# EAGLE board RS232v28_9x (EAGLE 9.7.0)
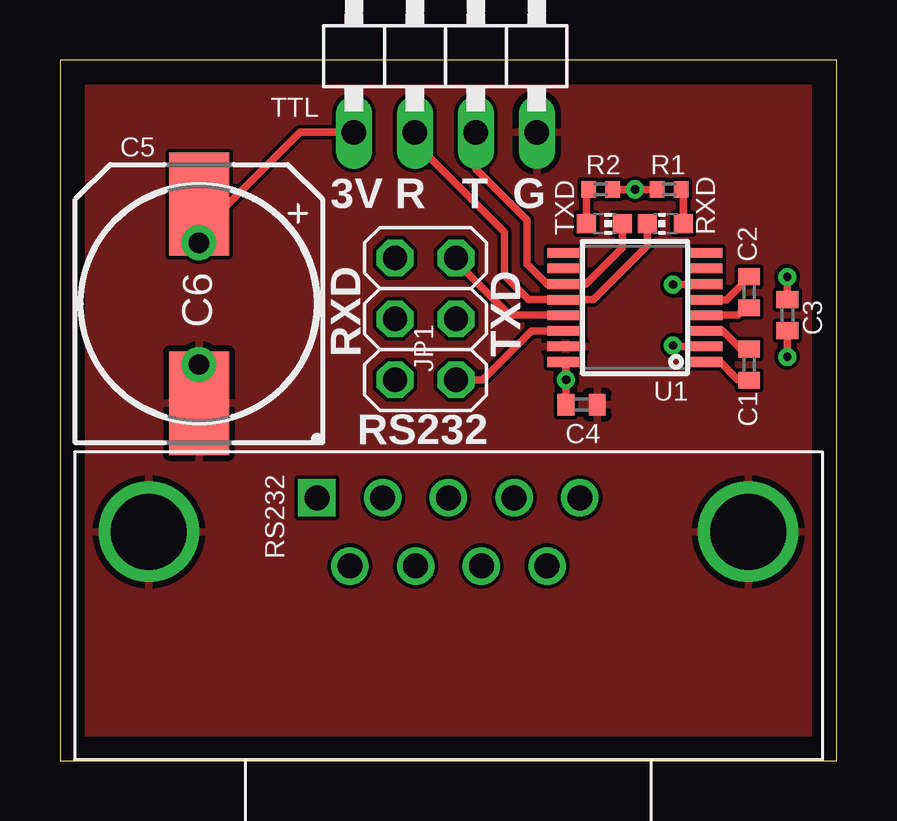
[diagram p0: board, top side]
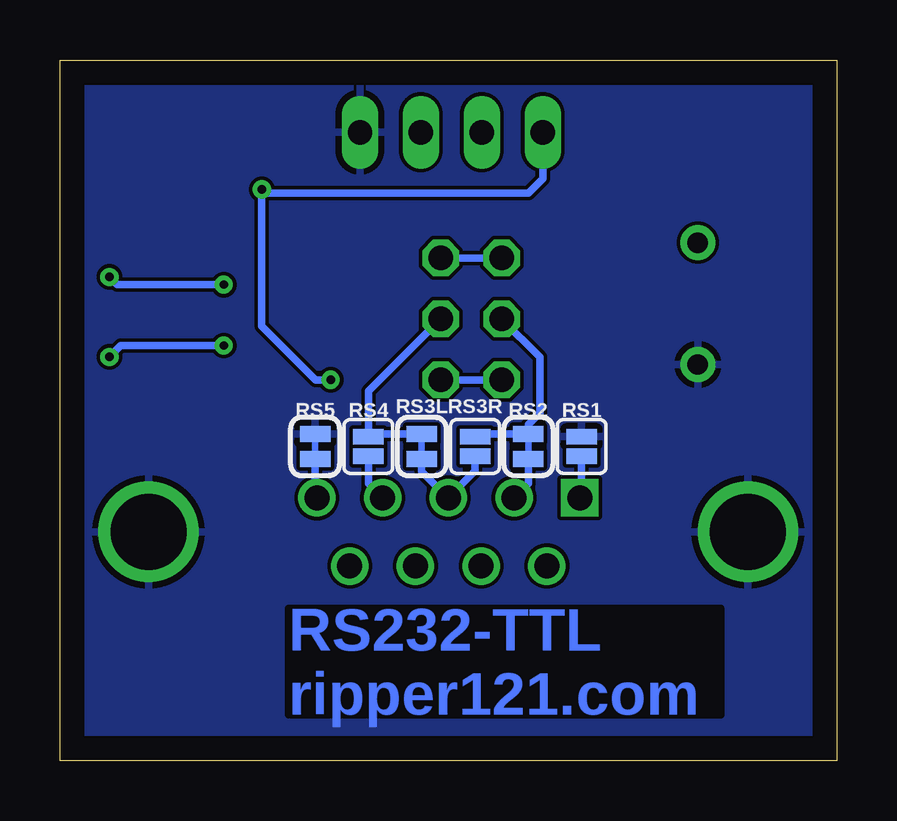
[diagram p1: board, bottom side, seen from below]

Size 32.38 x 29.21 mm. Coordinates in mm from the lower left corner, seen from the top.
Outline: 0,0 32.38,0 32.38,29.21 0,29.2 0,0
Copper layers (1*16): Top 0.035mm / dielectric 1.5mm / Bottom 0.035mm
Design rules "default": minimum track width 6mil, minimum drill 0.35mm, track to track 6mil, track to pad 6mil, pad to pad 6mil, via to via 6mil, smd to smd 6mil, copper to edge 40mil, drill to drill 6mil, minimum pad ring 10mil, minimum via ring 8mil, stop-mask expansion 4mil, vias tented up to drill 0mil, thermal gap 10mil

## Footprints (pad centres in the part's own frame; a part is rotated, then mirrored left to right if it is on the bottom)
C0402 = smd 0.7 x 0.9: 1 -0.65,0; 2 0.65,0
140CLH-1010 = smd 4.3 x 2.5: + 4.15,0; - -4.15,0
CAPPRD508W65D1000H1100B = drill 0.85 pad 1.45: 1 -2.54,0; 2 2.54,0
2X03 = drill 1.016 octagon: 1 -2.54,-1.27; 2 -2.54,1.27; 3 0,-1.27; 4 0,1.27; 5 2.54,-1.27; 6 2.54,1.27
R0402 = smd 0.6 x 0.7: 1 -0.5,0; 2 0.5,0
SMT-JUMPER_2_NO_SILK = smd 0.635 x 1.27: 1 -0.406,0; 2 0.406,0
SMT-JUMPER_2_NC_TRACE_SILK = smd 0.66 x 1.27: 1 -0.521,0; 2 0.521,0
5747840-4 = drill 1.04 square: 1 0,0 | drill 1.04: 2 2.74,0; 3 5.48,0; 4 8.22,0; 5 10.96,0; 6 1.37,-2.84; 7 4.11,-2.84; 8 6.85,-2.84; 9 9.59,-2.84 | drill 3.17: MH1 -7.01,-1.42; MH2 17.98,-1.42
CHIP-LED0603 = smd 0.8 x 0.8: A 0,-0.75; C 0,0.75
1X04/90 = drill 1.016 long: 1 -3.81,-3.81; 2 -1.27,-3.81; 3 1.27,-3.81; 4 3.81,-3.81
TSSOP16 = smd 0.4 x 1.5: 1 -2.275,-2.9; 2 -1.625,-2.9; 3 -0.975,-2.9; 4 -0.325,-2.9; 5 0.325,-2.9; 6 0.975,-2.9; 7 1.625,-2.9; 8 2.275,-2.9; 9 2.275,2.9; 10 1.625,2.9; 11 0.975,2.9; 12 0.325,2.9; 13 -0.325,2.9; 14 -0.975,2.9; 15 -1.625,2.9; 16 -2.275,2.9

## Placement (x,y rotation side)
C1  100n  [C0402]  28.73,16.51 90 top
C2  100n  [C0402]  28.73,19.53 90 top
C3  100n  [C0402]  30.32,18.57 90 top
C4  100n  [C0402]  21.75,14.84 0 top
C5  1000uF  [140CLH-1010]  5.79,19.05 90 top
C6  [CAPPRD508W65D1000H1100B]  5.79,19.05 270 top
JP1  PINHD-2X3  [2X03]  15.24,18.41 270 top
R1  1k  [R0402]  25.4,23.81 180 top
R2  1k  [R0402]  22.54,23.81 0 top
RS1  JUMPER-SMT_2_NO_SILK  [SMT-JUMPER_2_NO_SILK]  10.64,13.1 270 bottom
RS2  JUMPER-SMT_2_NO_SILK  [SMT-JUMPER_2_NC_TRACE_SILK]  12.86,13.1 270 bottom
RS3L  JUMPER-SMT_2_NC_TRACE_SILK  [SMT-JUMPER_2_NC_TRACE_SILK]  17.3,13.1 270 bottom
RS3R  JUMPER-SMT_2_NC_TRACE_SILK  [SMT-JUMPER_2_NO_SILK]  15.08,13.1 270 bottom
RS4  JUMPER-SMT_2_NO_SILK  [SMT-JUMPER_2_NO_SILK]  19.53,13.1 270 bottom
RS5  JUMPER-SMT_2_NO_SILK  [SMT-JUMPER_2_NC_TRACE_SILK]  21.75,13.1 270 bottom
RS232  D-DMR009  [5747840-4]  10.72,10.95 0 top
RXD  RED  [CHIP-LED0603]  25.24,22.38 90 top
TTL  PINHD-1X4/90  [1X04/90]  16.07,30 0 top
TXD  GREEN  [CHIP-LED0603]  22.7,22.38 270 top
U1  SP3232XTSSOP  [TSSOP16]  23.97,18.89 90 top

## Library data of the parts
C1-C5 = rcl; SPICEPREFIX: C
C6 = Capacitor; CATEGORY: Capacitor
JP1 = Connector; CATEGORY: Headers; DESCRIPTION: Header, Straight, 2x3 Position; MANUFACTURER: Generic; MPN: Generic; OPERATING_TEMPERATURE: Generic; PART_STATUS: Active; PITCH: 0.100" (2.54mm); ROHS_COMPLIANCE: Generic; SERIES: Generic; SUB-CATEGORY: Headers, Male Pins; TYPE: Board to Board or Cable, Unshrouded, Through Hole, Straight
R1 R2 = rcl; SPICEPREFIX: R
RS1 RS2 RS3L RS3R RS4 RS5 = SparkFun-Jumpers
RS232 = Connector_D-Sub; CATEGORY: Connector; DESCRIPTION: PCB D-Sub Connectors, Receptacle, Board-to-Board, 9 Position, 2.74mm [.108in] Centerline, 2 Row, Row-to-Row Spacing 2.84 mm [.112 in]; GENDER: Male; MANUFACTURER: TE Connectivity; MPN: 5747840-4; OPERATING_TEMP: -55°C to +105 °C; PART_STATUS: Active; ROHS_COMPLIANT: RoHS Compliant; SERIES: AMPLIMITE HD-20; SUB-CATEGORY: D-SUB; TYPE: R/A
RXD TXD = led
TTL = Connector; CATEGORY: Headers; DESCRIPTION: Header, Right Angle, 4 Position; MANUFACTURER: Generic; MPN: Generic; OPERATING_TEMPERATURE: Generic; PART_STATUS: Active; PITCH: 0.100" (2.54mm); ROHS_COMPLIANCE: Generic; SERIES: Generic; SUB-CATEGORY: Headers, Male Pins; TYPE: Board to Board or Cable, Unshrouded, Through Hole, Right Angle
U1 = SP3232EEY-L

## Nets
3V3: C4.1 C5.+ C6.1 R1.2 R2.2 TTL.1 U1.16
C1+: C1.1 U1.1
C1-: C1.2 U1.3
C2+: C2.1 U1.4
C2-: C2.2 U1.5
GND: C4.2 C5.- C6.2 RS1.1 RS5.1 RS232.MH1 RS232.MH2 TTL.4 U1.15
N$1: R1.1 RXD.A
N$2: R2.1 TXD.A
R1_IN: JP1.1 JP1.2 U1.13
R1_OUT: RXD.C TTL.2 U1.12
RS232_1: RS1.2 RS232.1
RS232_2: RS2.2 RS232.2
RS232_3: RS3L.2 RS3R.2 RS232.3
RS232_4: RS4.2 RS232.4
RS232_5: RS5.2 RS232.5
RS232_RXD: JP1.3 RS2.1 RS3R.1
RS232_TXD: JP1.4 RS3L.1 RS4.1
T1_IN: TTL.3 TXD.C U1.11
T1_OUT: JP1.5 JP1.6 U1.14
V+: C3.1 U1.2
V-: C3.2 U1.6

## Tracks (layer width: path | path; a pad name or v marks a point on that pad's centre or on a via)
3V3  (via drill 0.35)
  Top 0.305: R2.2 v23.97,23.81 R1.2 | TTL.1 10,26.19 6.43,22.62 5.87,22.62 5.87,23.12 C5.+ C6.1 | C4.1 v21.1,15.88 21.1,16.59 U1.16
  Bottom 0.305: v21.1,15.88 21.73,15.88 23.97,18.11 v23.97,23.81 23.81,23.65 12.86,23.65 12.26,24.26 TTL.1
C1+
  Top 0.305: U1.1 26.92,16.67 27.46,16.67 28.26,15.88 28.72,15.88 C1.1
C1-
  Top 0.305: U1.3 26.89,17.94 27.62,17.94 28.42,17.14 28.72,17.14 C1.2
C2+
  Top 0.305: C2.1 28.65,18.96 28.26,18.57 U1.4
C2-
  Top 0.305: C2.2 28.73,20.16 27.78,19.21 26.88,19.21 U1.5
GND
  pour Bottom: 0.15,0.15 32.87,0.15 32.87,29.06 0.15,29.06
  pour Top: 0.15,0.15 32.87,0.15 32.87,29.06 0.15,29.06
N$1
  Top 0.305: RXD.A 25.99,23.72 R1.1
N$2
  Top 0.305: TXD.A 21.95,23.72 R2.1
R1_IN
  Top 0.305: U1.13 18.74,18.57 16.51,20.8 JP1.2
  Bottom 0.305: JP1.1 JP1.2
R1_OUT
  Top 0.305: RXD.C 24.49,21.48 22.23,19.22 U1.12 19.53,19.22 18.53,20.22 18.53,22.03 14.8,25.77 TTL.2
RS232_1
  Bottom 0.305: RS232.1 10.64,11.03 RS1.2
RS232_2
  Bottom 0.305: RS232.2 12.86,11.55 RS2.2
RS232_3
  Bottom 0.305: RS3L.2 17.3,12.06 RS232.3 15.08,12.07 RS3R.2
RS232_4
  Bottom 0.305: RS232.4 19.53,11.54 RS4.2
RS232_5
  Bottom 0.305: RS232.5 21.75,11.03 RS5.2
RS232_RXD
  Bottom 0.305: JP1.3 12.38,16.83 12.38,14.49 12.86,14.01 RS2.1 14.97,13.62 RS3R.1
RS232_TXD
  Bottom 0.305: JP1.4 19.53,15.4 RS4.1 19.41,13.62 RS3L.1
T1_IN
  Top 0.305: TXD.C 23.45,21.39 21.93,19.87 U1.11 21.05,19.84 20.32,19.84 19.46,20.7 19.46,22.54 17.34,24.67 TTL.3
T1_OUT
  Top 0.305: U1.14 19.66,17.92 17.62,15.88 JP1.6
  Bottom 0.305: JP1.6 JP1.5
V+  (via drill 0.35)
  Top 0.305: U1.2 25.6,17.27 v25.56,17.3 | v30.32,16.83 C3.1
  Bottom 0.305: v25.56,17.3 29.84,17.3 v30.32,16.83
V-  (via drill 0.35)
  Top 0.305: U1.6 26.85,19.84 v25.56,19.84 | v30.32,20.16 C3.2
  Bottom 0.305: v30.32,20.16 30,19.84 v25.56,19.84

## Text on the board
Bottom: RS232-TTL / ripper121.com
tNames: 3V R T G | RXD | TXD | RS232
bStop: RS232-TTL / ripper121.com